# Altium PCB DomOctopus.PcbDoc
Units mil, origin at the board's own origin, x right, y up, seen from the top; angles counter-clockwise.
Board outline 2004.03 x 1724.03 mil, 2 copper layers (Top Layer, Bottom Layer); 40 components, 34 nets, 179 pads, 27 vias.
Unrouted connection lines stored in the file: 1.
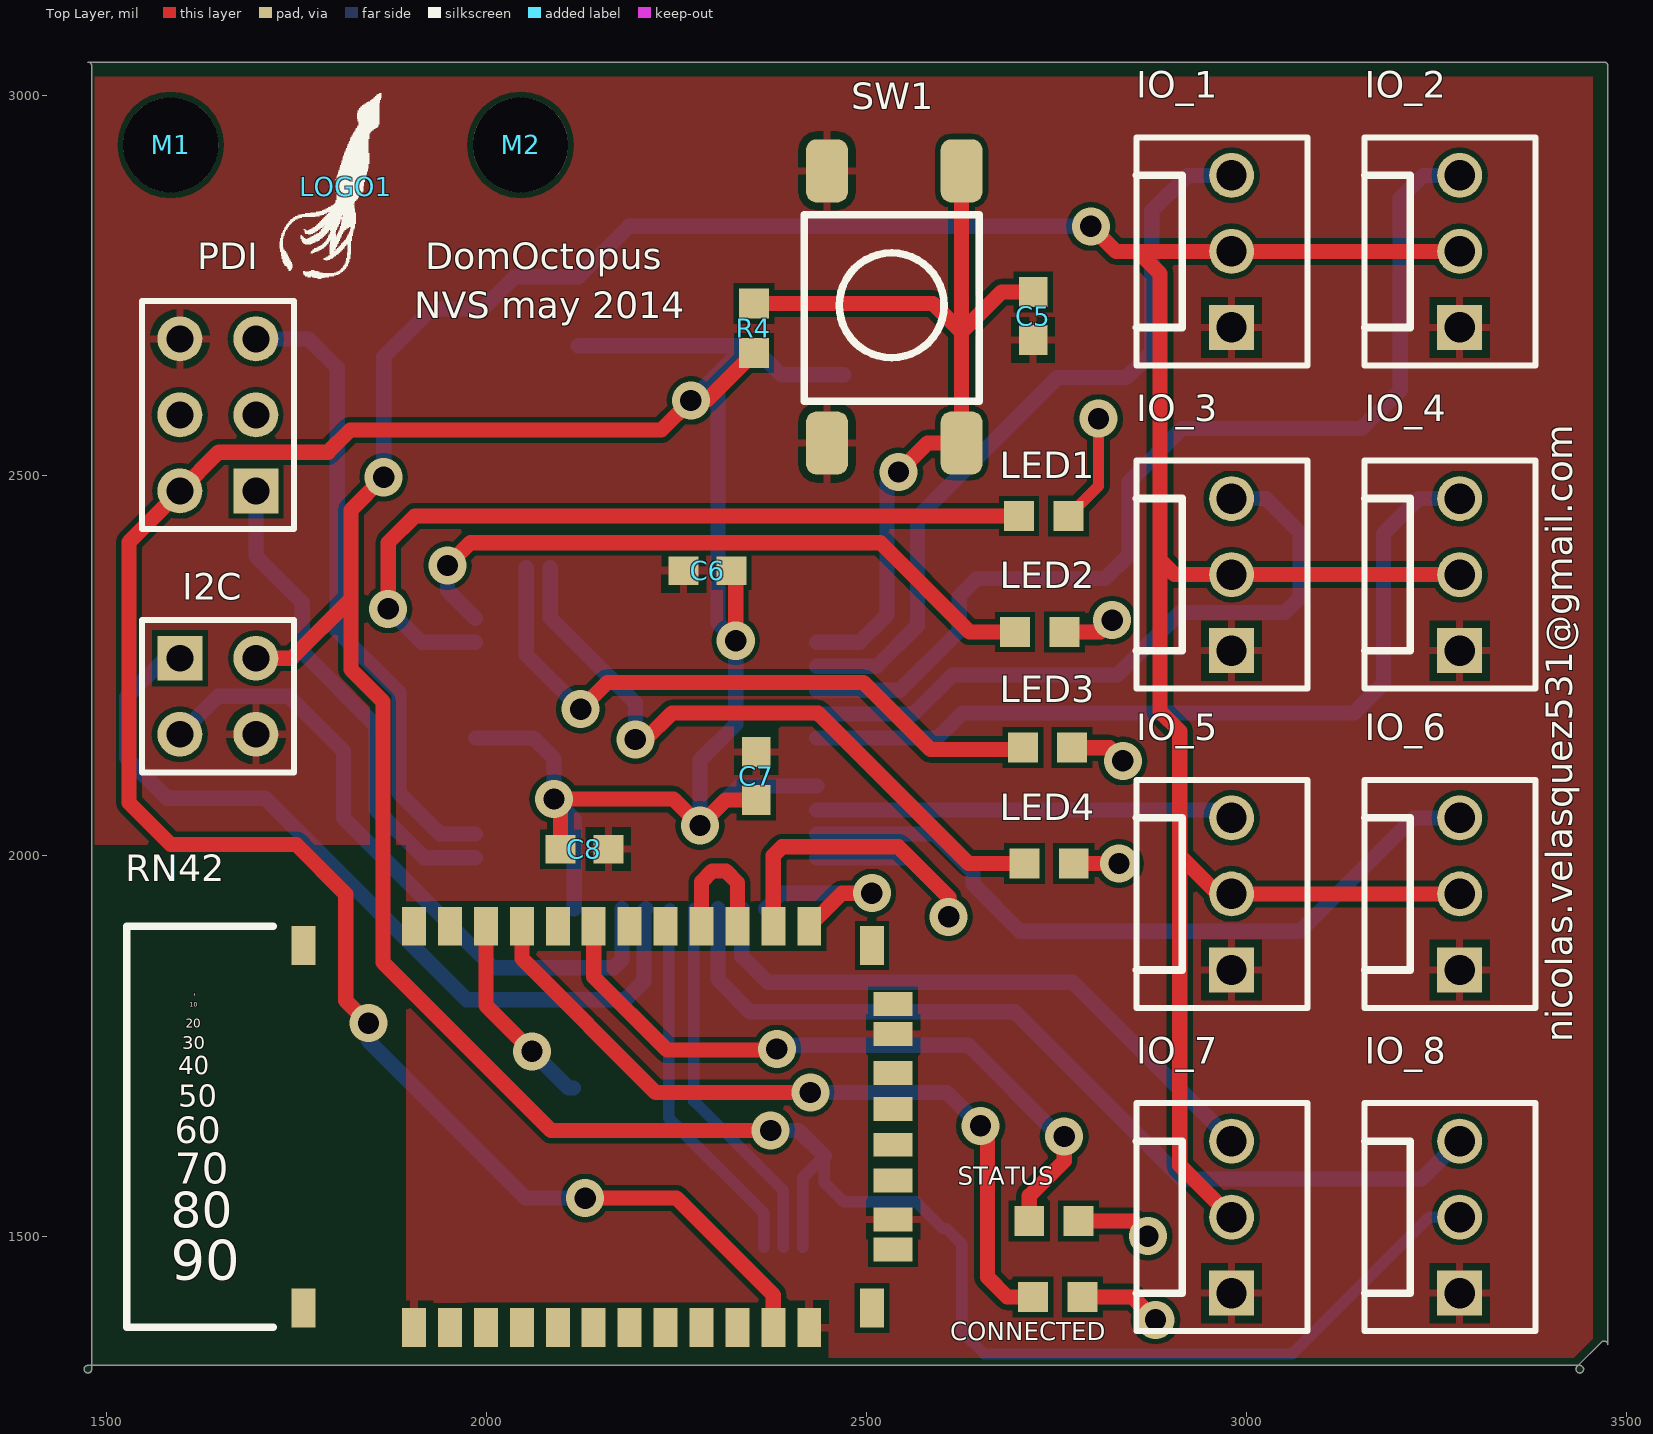
[diagram p0: Top Layer view]
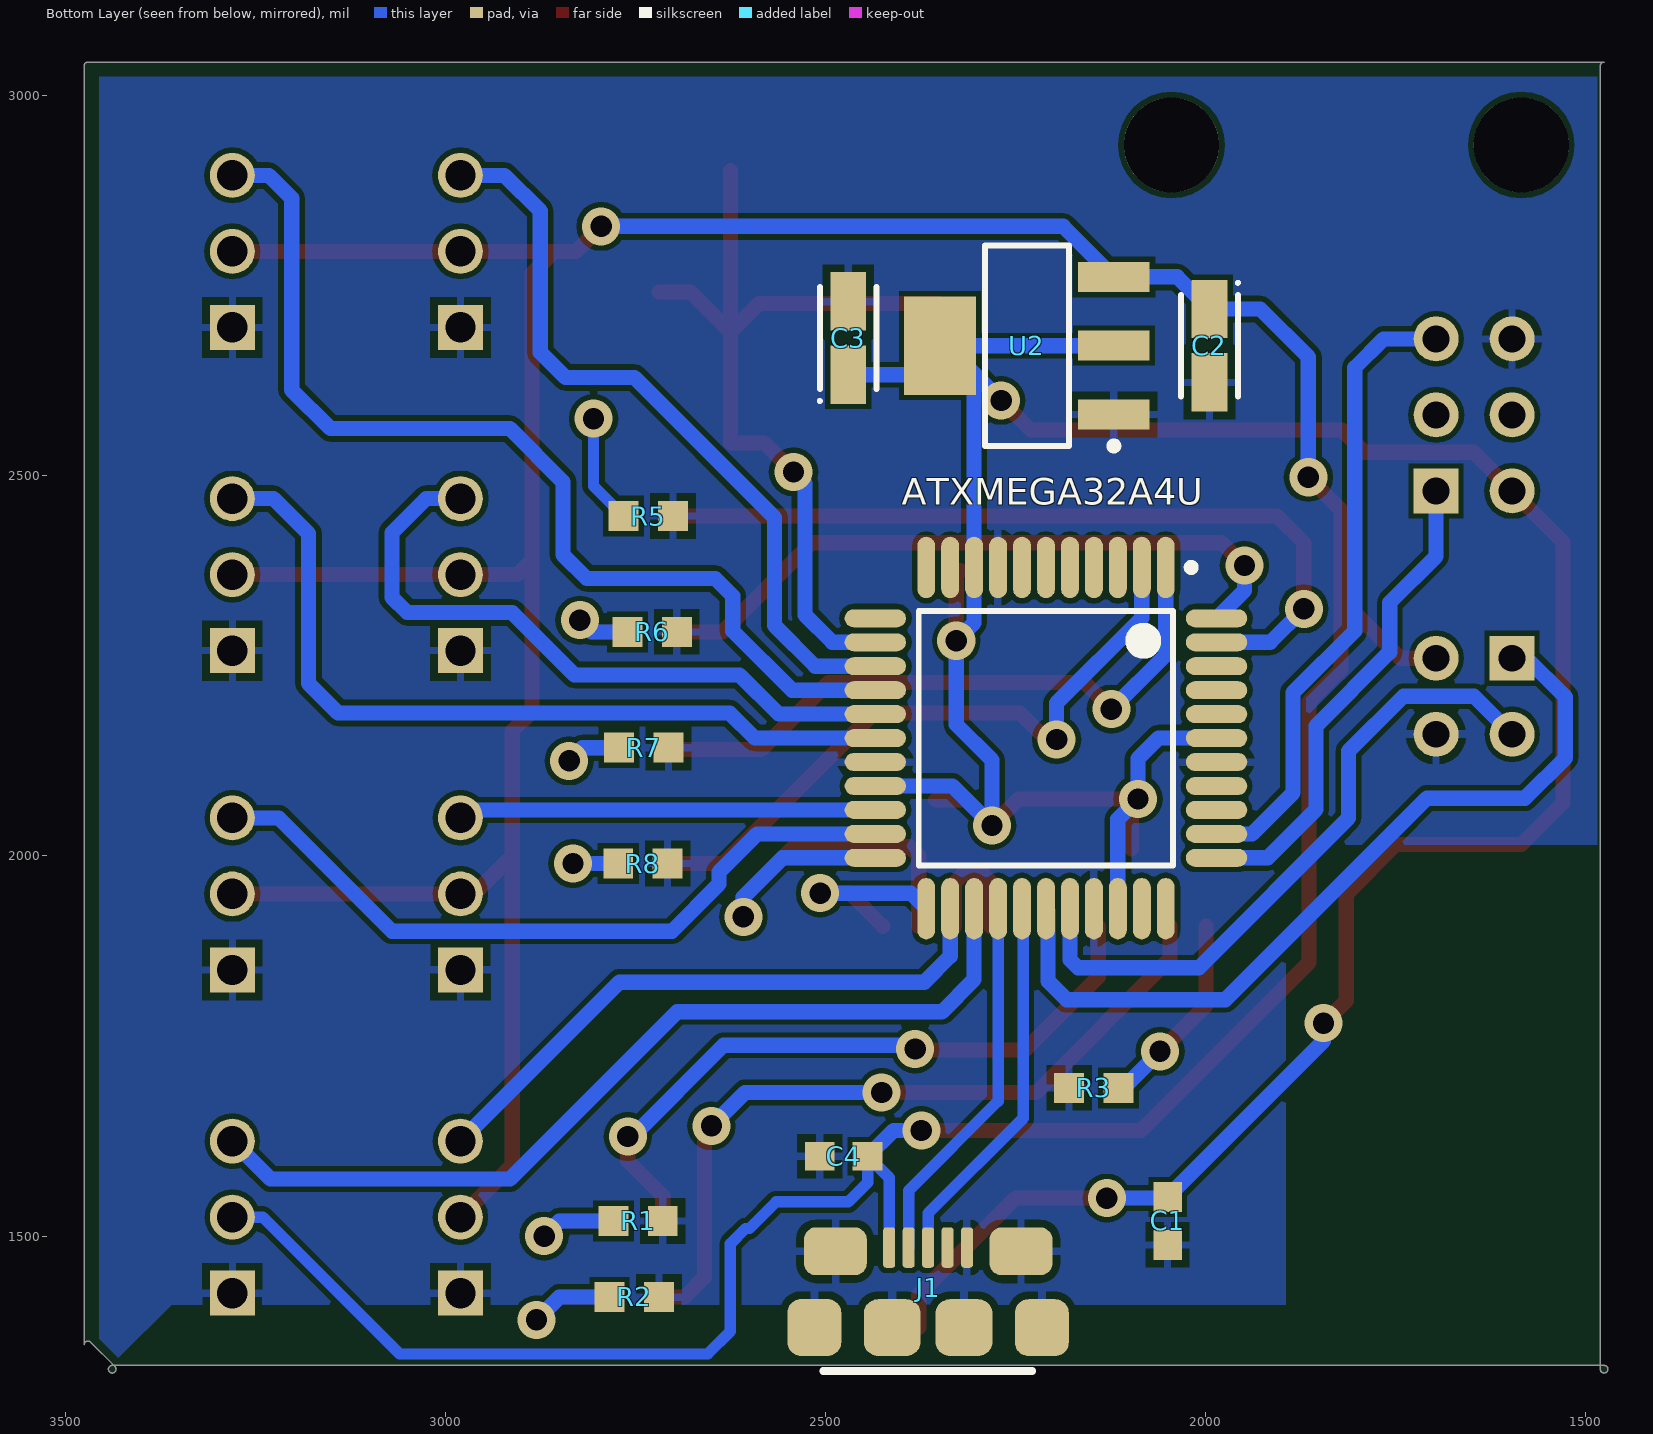
[diagram p1: Bottom Layer view, seen from below]

## Layer stack, top to bottom
Top Layer: signal copper 1.4
Dielectric: dielectric 12.6, FR-4, Dk 4.8
Bottom Layer: signal copper 1.4

## Board outline
1470.98,1325 ccw(c1476,1325) 1476,1319.98 ccw(c1476,1325) 1481.02,1325 1481.02,3039 ccw(c1476,3039) 1476,3044.01 3470,3044.01 cw(c3470,3039) 3475.01,3039 3475.01,1357 ccw(c3470,1357) 3466.45,1360.55 3434.45,1328.55 ccw(c3438,1325) 3438,1319.98 ccw(c3438,1325) 3441.56,1321.47 ccw(c3438,1325) 3443.01,1325 ccw(c3438,1325) 3438,1330.02 1476,1330.02 ccw(c1476,1325)

## Design rules (kind name [scope] priority, off if disabled: settings)
Clearance [All] p1: gap=7
MinimumSolderMaskSliver [All] p1: minsoldermaskwidth=7
PolygonConnect [All] p1: connectstyle=Relief reliefconductorwidth=10 reliefentries=4 polygonreliefangle="90 Angle" airgapwidth=10
RoutingVias [All] p1: holewidth=28 width=50 viastyle="Through Hole" minholewidth=28 minwidth=50 maxholewidth=28 maxwidth=50
SilkToSolderMaskClearance [IsPad] p1: minsilkscreentomaskgap=7 clearancetoexposedcopper=TRUE
SolderMaskExpansion [All] p1: expansion=4
Width [All] p1: maxlimit=20 minlimit=10 preferedwidth=15
26 further rules are at their usual default settings.

## Components (designator, comment, footprint, x,y, rotation, side; value= is the part's Value field where it differs from the comment)
ATXMEGA32A4U "ATXMEGA32A4U-AU" 44A_M 2210,2155 r270 bottom (schematic designator U3)
C1 "0.1uF" C0603_N 2050,1520 r90 bottom
C2 "10uF" C_TANT_A_3216_N 1995,2671 r270 bottom
C3 "10uF" C_TANT_A_3216_N 2470,2681 r90 bottom
C4 "0.1uF" C0603_N 2476,1605 r180 bottom
C5 "0.1uF" C0603_N 2719,2710 r270 top
C6 "0.1uF" C0603_N 2291,2375 r0 top
C7 "0.1uF" C0603_N 2355,2105 r270 top
C8 "0.1uF" C0603_N 2129,2009 r180 top
CONNECTED "Red" R0603_N 2751.48,1420 r0 top (schematic designator D2)
I2C "Header 2X2" HDR2X2 1597,2260 r270 top (schematic designator P6)
IO_1 "Conn x 3" "conn x 3" 2980,2695 r90 top (schematic designator P1)
IO_2 "Conn x 3" "conn x 3" 3280,2695 r90 top (schematic designator P4)
IO_3 "Conn x 3" "conn x 3" 2980,2270 r90 top (schematic designator P7)
IO_4 "Conn x 3" "conn x 3" 3280,2270 r90 top (schematic designator P9)
IO_5 "Conn x 3" "conn x 3" 2980,1850 r90 top (schematic designator P2)
IO_6 "Conn x 3" "conn x 3" 3280,1850 r90 top (schematic designator P5)
IO_7 "Conn x 3" "conn x 3" 2980,1425 r90 top (schematic designator P8)
IO_8 "Conn x 3" "conn x 3" 3280,1425 r90 top (schematic designator P10)
J1 "MICRO_USB" USB_MICRO_SMD 2365,1485 r180 bottom
LED1 "Blue" R0603_N 2733,2447 r0 top (schematic designator D3)
LED2 "Green" R0603_N 2728,2294.67 r0 top (schematic designator D4)
LED3 "Green" R0603_N 2738,2142.33 r0 top (schematic designator D5)
LED4 "Red" R0603_N 2740,1990 r0 top (schematic designator D6)
LOGO1 "Logo_DeepSea" DeepSea_logo1 1815,2880 r0 top
M1 "MountingHole-1/8in" MoutingHole-1/8in 1585,2935 r0 top
M2 "MountingHole-1/8in" MoutingHole-1/8in 2045,2935 r0 top
PDI "Header 3X2" HDR2X3 1697,2480 r90 top (schematic designator P3)
R1 "1K" R0603_N 2746.48,1520 r0 bottom
R2 "1K" R0603_N 2751.48,1420 r0 bottom
R3 "10K" R0603_N 2147,1695 r0 bottom
R4 "1K" R0603_N 2352,2694 r270 top
R5 "1K" R0603_N 2733,2447 r0 bottom
R6 "1K" R0603_N 2728,2294.67 r0 bottom
R7 "1K" R0603_N 2739,2142.33 r0 bottom
R8 "1K" R0603_N 2740,1990 r0 bottom
RN42 "BLUETOOTH RN42-I/RM" RN42 1905,1380 r90 top (schematic designator U1)
STATUS "Green" R0603_N 2746.48,1520 r0 top (schematic designator D1)
SW1 "SWITCH" swich_foot 2448,2543 r90 top
U2 "LM1117MPX-1.8/NOPB" MP04A_N 2235,2671 r0 bottom

## Footprints (in the part's own frame and the unit in brackets; to place one, negate y for a bottom-side part, rotate by r counter-clockwise, add the part's x,y. Pads: shape width x height; smd on the part's side, far side on the other; paste and mask are expansions set on the pad)
44A_M [mm] "Thin QFP, 44-Leads, Body 10x10mm, Pitch 0.8mm, IPC Low Density"
  oval 2.05x0.6 smd: 1(-5.7,4) 2(-5.7,3.2) 3(-5.7,2.4) 4(-5.7,1.6) 5(-5.7,0.8) 6(-5.7,0) 7(-5.7,-0.8) 8(-5.7,-1.6) 9(-5.7,-2.4) 10(-5.7,-3.2) 11(-5.7,-4) 23(5.7,-4) 24(5.7,-3.2) 25(5.7,-2.4) 26(5.7,-1.6) 27(5.7,-0.8) 28(5.7,0) 29(5.7,0.8) 30(5.7,1.6) 31(5.7,2.4) 32(5.7,3.2) 33(5.7,4)
  oval 0.6x2.05 smd: 12(-4,-5.7) 13(-3.2,-5.7) 14(-2.4,-5.7) 15(-1.6,-5.7) 16(-0.8,-5.7) 17(0,-5.7) 18(0.8,-5.7) 19(1.6,-5.7) 20(2.4,-5.7) 21(3.2,-5.7) 22(4,-5.7) 34(4,5.7) 35(3.2,5.7) 36(2.4,5.7) 37(1.6,5.7) 38(0.8,5.7) 39(0,5.7) 40(-0.8,5.7) 41(-1.6,5.7) 42(-2.4,5.7) 43(-3.2,5.7) 44(-4,5.7)
  silkscreen extent -5.82,-4.25 4.25,4.97, body extent -5,-5 5,5, height 1.2
C0603_N [mm] "Chip Capacitor, 2-Leads, Body 1,60x0,80mm, IPC Medium Density"
  rect 1x0.95 smd: 1(-0.8,0) 2(0.8,0)
  body extent -0.88,-0.48 0.87,0.48, height 0.85
C_TANT_A_3216_N [mm] "Molded Capacitor, 2-Leads, Body 3,20x1,60mm, IPC Medium Density"
  rect 1.95x1.2 smd: 1(-1.225,0) 2(1.225,0)
  silkscreen extent -2.15,-0.95 1.7,1, body extent -1.7,-0.9 1.7,0.9, height 1.8
"conn x 3" [mm]
  rect 1.5x1.5 hole 1.016: 1(0,0)
  round 1.5 hole 1.016: 2(2.54,0) 3(5.08,0)
  silkscreen extent -1.27,-2.54 6.35,3.18
DeepSea_logo1 [mil]
  silkscreen extent -87,-120 47,123
HDR2X2 [mm] "Connector; Header; 2x2 Position"
  rect 1.5x1.5 hole 0.9: 1(0,0)
  round 1.5 hole 0.9: 2(0,2.54) 3(2.54,0) 4(2.54,2.54)
  silkscreen extent -1.27,-1.27 3.81,3.81
HDR2X3 [mm] "Connector; Header; 3x2 Position"
  rect 1.5x1.5 hole 0.9: 1(0,0)
  round 1.5 hole 0.9: 2(0,2.54) 3(2.54,0) 4(2.54,2.54) 5(5.08,0) 6(5.08,2.54)
  silkscreen extent -1.27,-1.27 6.35,3.81
MoutingHole-1/8in [mil]
  round 125 hole 125: 0(0,0)
MP04A_N [mm] "SOT223, 4-Leads, Body 6.5x3.5mm, Pitch 2.3mm, Lead Span 7mm, IPC Medium Density"
  rect 2.4x1 smd: 1(-2.9,2.3) 2(-2.9,0) 3(-2.9,-2.3)
  rect 2.4x3.3 smd: 4(2.9,0)
  silkscreen extent -3.02,-3.35 1.4,3.47, body extent -1.85,-3.35 1.85,3.35, height 1.8
R0603_N [mm] "Chip Resistor, 2-Leads, Body 1,60x0,85mm, IPC Medium Density"
  rect 1x1 smd: 1(-0.825,0) 2(0.825,0)
  body extent -0.87,-0.48 0.87,0.47, height 0.45
RN42 [mm]
  rect 1.3x0.8 smd: 1(0,0) 2(0,-1.2) 3(0,-2.4) 4(0,-3.6) 5(0,-4.8) 6(0,-6) 7(0,-7.2) 8(0,-8.4) 9(0,-9.6) 10(0,-10.8) 11(0,-12) 12(0,-13.2) 13(13.4,-13.2) 14(13.4,-12) 15(13.4,-10.8) 16(13.4,-9.6) 17(13.4,-8.4) 18(13.4,-7.2) 19(13.4,-6) 20(13.4,-4.8) 21(13.4,-3.6) 22(13.4,-2.4) 23(13.4,-1.2) 24(13.4,0) ""(0.65,3.7) ""(0.65,-15.3) ""(12.75,3.7) ""(12.75,-15.3)
  rect 0.8x1.3 smd: 28(9.8,-16) 29(3.6,-16) 30(10.8,-16) 31(8.5,-16) 32(7.3,-16) 33(6.1,-16) 34(4.9,-16) 35(2.6,-16)
  silkscreen extent 0,4.7 13.4,9.6, body extent 0.2,-16.05 13.2,10.85, height 2.4
swich_foot [mil]
  rrect50% 83x55 smd: 1(0,0) 1(358,0) 2(0,-177) 2(358,-177)
  silkscreen extent 55,-200 300,30, body extent 57,-201 300,29, height 138
USB_MICRO_SMD [mm]
  rrect50% 0.4x1.35 smd: 1(-1.3,0) 2(-0.65,0) 3(0,0) 4(0.65,0) 5(1.3,0)
  rrect50% 1.8x1.9 smd: shd(-3.8,-2.67) shd(3.8,-2.675)
  rrect50% 2.1x1.6 smd: shd(-3.1,-0.125) shd(3.1,-0.125)
  rrect50% 1.9x1.9 smd: shd(-1.2,-2.675) shd(1.2,-2.675)
  silkscreen extent -3.5,-4.13 3.47,-4.13, body extent -3.96,-5.1 4.01,0.32, height 2.68

## Part data
ATXMEGA32A4U: "IC MCU 8BIT 32KB FLASH 44TQFP"
C1 C4 C5 C6 C7 C8: library part C_SMD
C2 C3: library part CP_SMD
CONNECTED LED1 LED2 LED3 LED4 STATUS: library part LED_SMD
I2C: "Header, 2-Pin, Dual row"
IO_1 IO_2 IO_3 IO_4 IO_5 IO_6 IO_7 IO_8: "CONN HEADER VERT 3POS .100 TIN"
J1: "CONN USB MICRO B RECPT SMT R/A"
PDI: "Header, 3-Pin, Dual row"
R1 R2 R3 R4 R5 R6 R7 R8: library part R_SMD
RN42: "MODULE BLUETOOTH V2.1+EDR"
SW1: "SWITCH TACTILE SPST-NO 0.05A 12V"
U2: "800mA Low-Dropout Linear Regulator, 4-pin SOT-223, Pb-Free"

## Via types
v1: diameter 50, hole 28, Top Layer to Bottom Layer, 27 vias

## Nets (pads, with @x,y where several pads share a name; then routed paths per layer and width w, separated by ;. In a path a pad name is that pad's centre, name@x,y a point inside that pad or via, vN(x,y) a via of type N, cw(c..) or ccw(c..) an arc to the next point about the centre after c; other vN are vias at no path point)
3V3: ATXMEGA32A4U.9 ATXMEGA32A4U.19 ATXMEGA32A4U.31 ATXMEGA32A4U.39 C1.2 C3.1 C6.2 C7.2 C8.2 PDI.2 R4.2 RN42.11 U2.2 U2.4 | length 4623.6
  Top Layer w20: v1(1845,1780) 1815,1810 1815,1950 1750,2015 1585,2015 1530,2070 1530,2413 PDI.2 1648,2531 1792,2531 1821,2560 2230,2560 v1(2269,2599) 2289.48,2599 R4.2 ; C8.2 2097.5,2066.5 v1(2089,2075) 2246,2075 v1(2281,2040) 2314.5,2073.5 C7.2 ; v1(2130,1550) 2250,1550 2377.44,1422.56 RN42.11 ; C6.2 2328,2369.5 v1(2328,2283)
  Bottom Layer w20: v1(1845,1780) 1845,1756.5 C1.2 2051.5,1550 v1(2130,1550) ; ATXMEGA32A4U.39 2062,2155 2089,2128 v1(2089,2075) 2115.51,2048.49 ATXMEGA32A4U.31 ; U2.2 U2.4@2341,2671 ; v1(2269,2599) U2.4@2341,2671 ; ATXMEGA32A4U.19 2333.01,2092.01 v1(2281,2040) 2281,2126 2328,2173 v1(2328,2283) 2304.49,2306.51 ATXMEGA32A4U.9 2304.49,2626.31 U2.4 ; C3.1 2387.4,2632.77 U2.4 ; U2.4@2341,2671 U2.4
BT_RX: ATXMEGA32A4U.22 RN42.14 | length 602.5
  Top Layer w20: RN42.14 2377.44,2000.44 2389,2012 2542,2012 2608,1946 v1(2608,1920)
  Bottom Layer w20: ATXMEGA32A4U.22 2556.48,1997.52 2608,1946 v1(2608,1920)
BT_TX: ATXMEGA32A4U.23 RN42.13 | length 248.3
  Top Layer w20: RN42.13 2468.13,1951 v1(2507,1951)
  Bottom Layer w20: ATXMEGA32A4U.23 2387.89,1951 v1(2507,1951)
GND: ATXMEGA32A4U.8 ATXMEGA32A4U.18 ATXMEGA32A4U.30 ATXMEGA32A4U.38 C1.1 C2.2 C3.2 C4.1 C5.2 C6.1 C7.1 C8.1 I2C.4 IO_1.1 IO_2.1 IO_3.1 IO_4.1 IO_5.1 IO_6.1 IO_7.1 IO_8.1 J1.5 J1.shd PDI.6 R1.1 R2.1 R3.2 R5.1 R6.1 R7.1 R8.1 RN42.1 RN42.12 RN42.28 RN42.29 SW1.1 U2.1
IO_1: ATXMEGA32A4U.14 IO_1.3 | length 1005.1
  Bottom Layer w20: ATXMEGA32A4U.14 2513.49,2249.49 2567,2303 2567,2445 2751,2629 2842,2629 2875,2662 2875,2848 2922,2895 IO_1.3
IO_2: ATXMEGA32A4U.15 IO_2.3 | length 1356.8
  Bottom Layer w20: ATXMEGA32A4U.15 2543.99,2217.99 2622,2296 2622,2342 2645,2365 2814,2365 2845,2396 2845,2492 2915,2562 3151,2562 3202,2613 3202,2865 3232,2895 IO_2.3
IO_3: ATXMEGA32A4U.16 IO_3.3 | length 892.8
  Bottom Layer w20: ATXMEGA32A4U.16 2561.5,2186.5 2613,2238 2830,2238 2912,2320 3050,2320 3070,2340 3070,2425 3025,2470 IO_3.3
IO_4: ATXMEGA32A4U.17 IO_4.3 | length 1091.5
  Bottom Layer w20: ATXMEGA32A4U.17 2593,2155 2626,2188 3141,2188 3180,2227 3180,2424 3226,2470 IO_4.3
IO_5: ATXMEGA32A4U.20 IO_5.3 | length 549.9
  Bottom Layer w20: ATXMEGA32A4U.20 2969.49,2060.51 IO_5.3
IO_6: ATXMEGA32A4U.21 IO_6.3 | length 969.7
  Bottom Layer w20: ATXMEGA32A4U.21 2589.98,2029.02 2640,1979 2640,1963 2702,1901 3070,1901 3219,2050 IO_6.3
IO_7: ATXMEGA32A4U.24 IO_7.3 | length 807.3
  Bottom Layer w20: ATXMEGA32A4U.24 2335.98,1868.02 2370,1834 2771,1834 IO_7.3
IO_8: ATXMEGA32A4U.25 IO_8.3 | length 1198
  Bottom Layer w20: ATXMEGA32A4U.25 2304.49,1837.51 2347,1795 2695,1795 2915,1575 3230,1575 IO_8.3
LED1: ATXMEGA32A4U.43 LED1.1 | length 1063.8
  Top Layer w20: v1(1871,2325) 1871,2412 1906,2447 LED1.1
  Bottom Layer w20: v1(1871,2325) 1915.02,2280.98 ATXMEGA32A4U.43
LED2: ATXMEGA32A4U.44 LED2.1 | length 892.2
  Top Layer w20: v1(1949,2382) 1979,2412 2518,2412 2635.33,2294.67 LED2.1
  Bottom Layer w20: v1(1949,2382) 1949,2349.07 ATXMEGA32A4U.44
LED3: ATXMEGA32A4U.1 LED3.1 | length 849.5
  Top Layer w20: v1(2124,2193) 2159,2228 2496,2228 2584,2140 2703.19,2140 LED3.1
  Bottom Layer w20: ATXMEGA32A4U.1 2052.52,2264.48 v1(2124,2193)
LED4: ATXMEGA32A4U.2 LED4.1 | length 880.8
  Top Layer w20: v1(2196,2153) 2209,2153 2244,2188 2436,2188 2634,1990 LED4.1
  Bottom Layer w20: ATXMEGA32A4U.2 2084.02,2312.98 2196,2201 v1(2196,2153)
NetD1_1: RN42.19 STATUS.1 | length 907.7
  Top Layer w20: RN42.19 2141.22,1841 2237.61,1744.61 2380.61,1744.61 v1(2382,1746) ; STATUS.1 2714,1553 2760,1599 v1(2760,1631)
  Bottom Layer w20: v1(2382,1746) 2387,1751 2634,1751 2754,1631 v1(2760,1631)
NetD1_2: R1.2 STATUS.2 | length 198.6
  Top Layer w20: STATUS.2 2850,1520 v1(2870,1500)
  Bottom Layer w20: R1.2 2850,1520 v1(2870,1500)
NetD2_1: CONNECTED.1 RN42.21 | length 1010.5
  Top Layer w20: RN42.21 2046.73,1865 2222.73,1689 v1(2426,1689) ; v1(2650,1645) 2659,1636 2659,1446 2685,1420 CONNECTED.1
  Bottom Layer w20: v1(2426,1689) 2606,1689 v1(2650,1645)
NetD2_2: CONNECTED.2 R2.2 | length 216.9
  Top Layer w20: CONNECTED.2 2850,1420 v1(2880,1390)
  Bottom Layer w20: R2.2 2850,1420 v1(2880,1390)
NetD3_2: LED1.2 R5.2 | length 288.7
  Top Layer w15: LED1.2 2805,2486.52 v1(2805,2575)
  Bottom Layer w15: R5.2 2805,2486.52 v1(2805,2575)
NetD4_2: LED2.2 R6.2 | length 137.7
  Top Layer w20: LED2.2 2807.67,2294.67 v1(2823,2310)
  Bottom Layer w20: R6.2 2807.67,2294.67 v1(2823,2310)
NetD5_2: LED3.2 R7.2 | length 146.4
  Top Layer w20: LED3.2 2819.67,2142.33 v1(2837,2125)
  Bottom Layer w20: R7.2 2819.67,2142.33 v1(2837,2125)
NetD6_2: LED4.2 R8.2 | length 119
  Top Layer w20: LED4.2 v1(2832,1990)
  Bottom Layer w20: R8.2 v1(2832,1990)
NetR3_1: R3.1 RN42.22 | length 264
  Top Layer w20: RN42.22 1999.49,1803.51 v1(2060,1743)
  Bottom Layer w20: v1(2060,1743) 2108,1695 R3.1
NetU1_15: RN42.15 RN42.16 | length 175
  Top Layer w20: RN42.16 2282.95,1965.95 2297,1980 2315,1980 2330.2,1964.8 RN42.15
PDI_CLK: ATXMEGA32A4U.35 PDI.5 | length 838.2
  Bottom Layer w20: PDI.5 1766,2680 1804,2642 1804,2296 1885,2215 1885,2083 1938.98,2029.02 ATXMEGA32A4U.35
PDI_DATA: ATXMEGA32A4U.34 PDI.1 | length 641.3
  Bottom Layer w20: PDI.1 1697,2394 1758,2333 1758,2268 1855,2171 1855,2061 1918.48,1997.52 ATXMEGA32A4U.34
SCL: ATXMEGA32A4U.29 I2C.3 | length 873.1
  Bottom Layer w20: I2C.3 1647,2210 1740,2210 1812,2138 1812,2050 2009,1853 2168,1853 2178.5,1863.5 ATXMEGA32A4U.29
SDA: ATXMEGA32A4U.28 I2C.1 | length 1089.6
  Bottom Layer w20: I2C.1 1578,2260 1527,2209 1527,2129 1580,2076 1709,2076 1974,1811 2183,1811 2207.31,1835.31 2207.31,1927.91 ATXMEGA32A4U.28
SW_PROGRAM: ATXMEGA32A4U.13 C5.1 R4.1 SW1.2 | length 1162.7
  Top Layer w20: R4.1 2587.52,2726.48 2625,2689 ; v1(2542,2505) 2580,2543 2625,2543 2625,2689 ; SW1.2@2625,2901 2625,2689 ; C5.1 2677.5,2741.5 2625,2689
  Bottom Layer w20: ATXMEGA32A4U.13 2490.98,2280.98 2527,2317 2527,2490 v1(2542,2505)
USB_DM: ATXMEGA32A4U.26 J1.2 | length 494.3
  Bottom Layer w15: ATXMEGA32A4U.26 2272.99,1677.6 2390.59,1560 J1.2
USB_DP: ATXMEGA32A4U.27 J1.3 | length 498
  Bottom Layer w15: ATXMEGA32A4U.27 2240,1929.09 2240,1655 2365,1530 J1.3
VCC: C2.1 C4.2 I2C.2 IO_1.2 IO_2.2 IO_3.2 IO_4.2 IO_5.2 IO_6.2 IO_7.2 IO_8.2 J1.1 U2.3 | length 6523.1
  Top Layer w20: I2C.2 1744,2260 1822,2338 ; v1(1865,2498) 1822,2455 1822,2338 ; v1(2374,1639) 2085,1639 1864,1860 1864,2203 1822,2245 1822,2338 ; v1(2795,2828) 2828,2795 2857,2795 ; IO_7.2 2912,1593 2912,2000 ; IO_6.2 IO_5.2 2962,1950 2912,2000 ; IO_4.2 IO_3.2 2905,2370 2886,2389 ; IO_2.2 IO_1.2 2857,2795 ; 2857,2795 2886,2766 2886,2389 ; 2886,2389 2886,2190 2912,2164 2912,2000
  Bottom Layer w15: J1.1 2416.18,1576.68 C4.2 2444.5,1570.5 2470,1545 2565,1545 2600,1510 2605,1510 2625,1490 2625,1375 2655,1345 3060,1345 3240,1525 IO_8.2
  Bottom Layer w20: v1(1865,2498) 1865,2656 1928.23,2719.23 C2.1 2037.32,2761.55 U2.3 2187.28,2828 v1(2795,2828) ; v1(2374,1639) 2410.5,1639 C4.2
pads on no net: ATXMEGA32A4U.3 ATXMEGA32A4U.4 ATXMEGA32A4U.5 ATXMEGA32A4U.6 ATXMEGA32A4U.7 ATXMEGA32A4U.10 ATXMEGA32A4U.11 ATXMEGA32A4U.12 ATXMEGA32A4U.32 ATXMEGA32A4U.33 ATXMEGA32A4U.36 ATXMEGA32A4U.37 ATXMEGA32A4U.40 ATXMEGA32A4U.41 ATXMEGA32A4U.42 J1.4 M1.0 M2.0 PDI.3 PDI.4 RN42. RN42.2 RN42.3 RN42.4 RN42.5 RN42.6 RN42.7 RN42.8 RN42.9 RN42.10 RN42.17 RN42.18 RN42.20 RN42.23 RN42.24 RN42.30 RN42.31 RN42.32 RN42.33 RN42.34 RN42.35

## Polygon pours and split planes (outlines as drawn)
GND on Bottom Layer "Top Layer-No Net" (solid, remove dead copper, pour order 4): 1485,2015 1485,3025 3455,3025 3455,1365 3430,1340 3360,1410 1895,1410 1895,2015 1485,2015
GND on Top Layer "Top Layer-No Net" (solid, remove dead copper, pour order 2): 1485,2015 1485,3025 3455,3025 3455,1370 3455,1365 3430,1340 1895,1340 1895,2015 1490,2015

## Silkscreen, mask and mechanical layers (free items; w line width, h text height)
Top Overlay:
  text "DomOctopus" at 1920,2760 h60
  text "NVS may 2014" at 1905,2695 h60
  text "5" at 1615,1815 h5
  text "10" at 1610,1800 h10
  text "20" at 1605,1770 h20
  text "nicolas.velasquez531@gmail.com" at 3440,1755 h60 r90
  text "30" at 1600,1740 h30
  text "40" at 1595,1705 h40
  text "50" at 1595,1660 h50
  text "60" at 1590,1610 h60
  text "70" at 1590,1555 h70
  text "80" at 1585,1495 h80
  text "90" at 1585,1425 h90
Mechanical 1:
  lines w10: 1476,1325 1476,3039 3470,3039 3470,1357 3438,1325 1476,1325